# EAGLE board collatz_box (EAGLE 6.2)
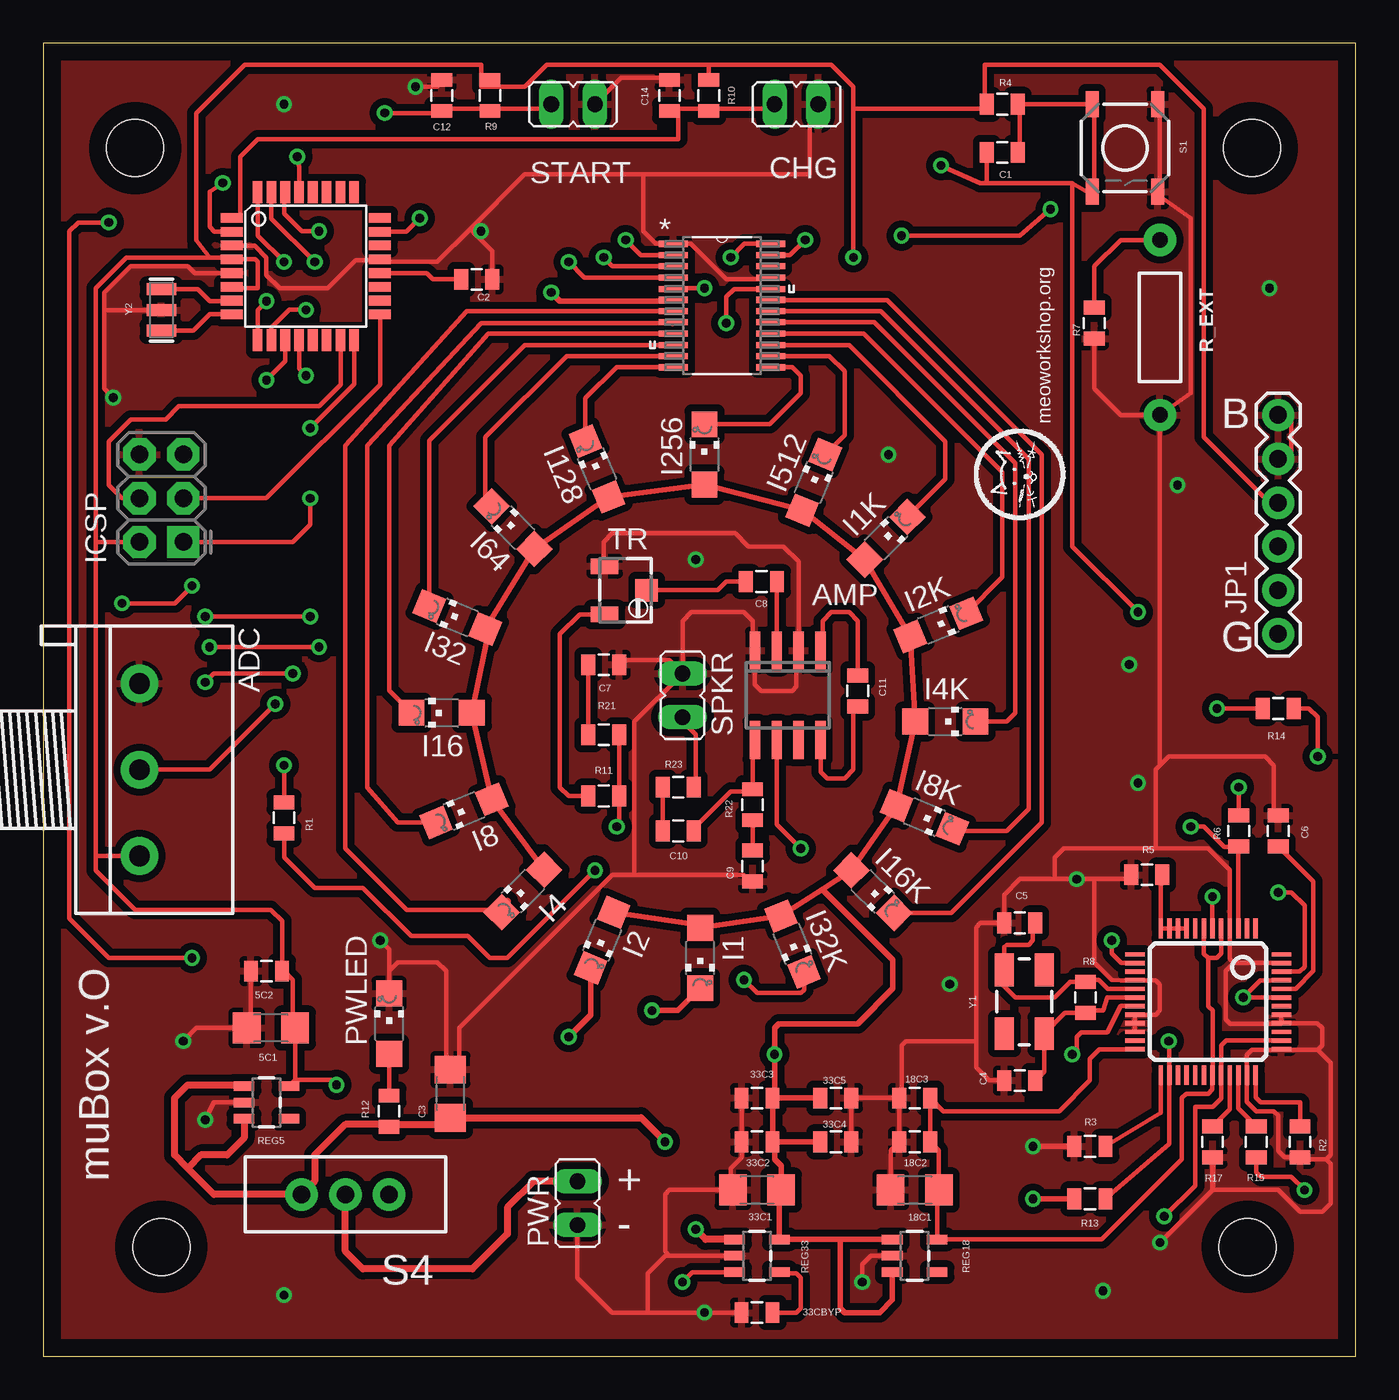
[diagram p0: board, top side]
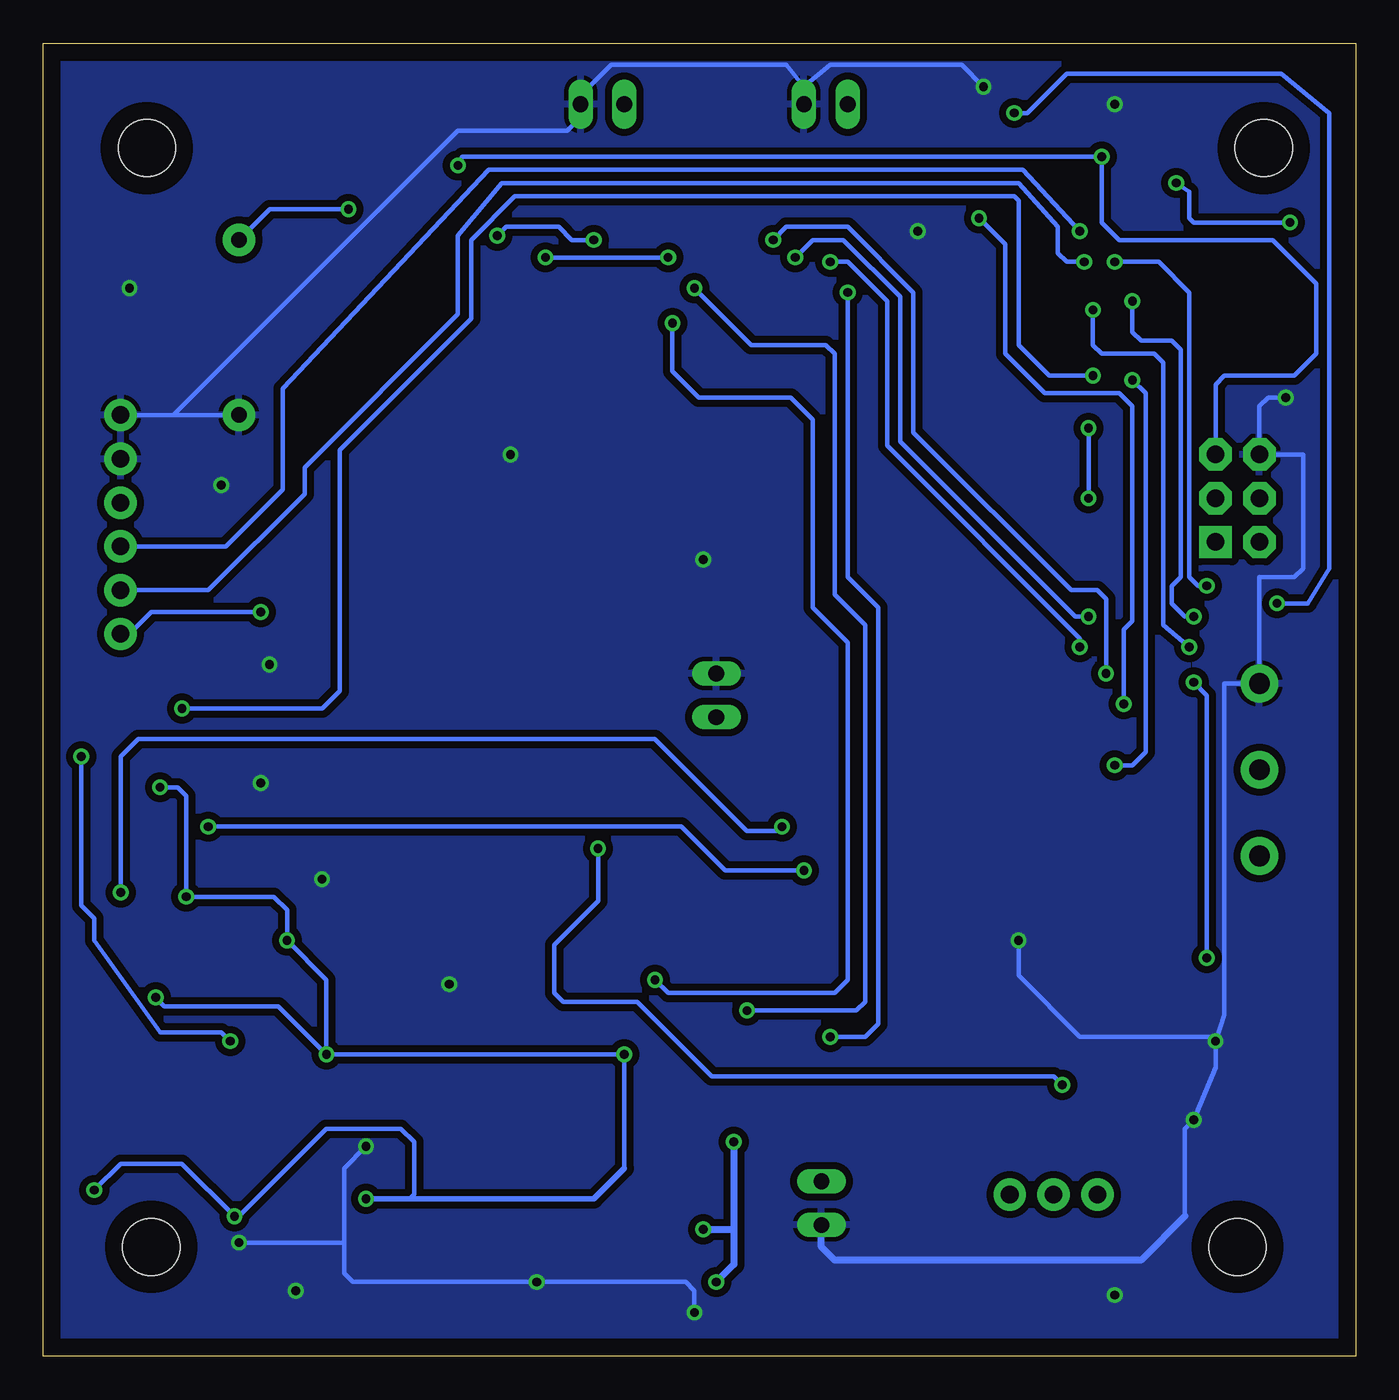
[diagram p1: board, bottom side, seen from below]

Size 76.12 x 76.19 mm. Coordinates in mm from the lower left corner, seen from the top.
Outline: 0,0 76.12,0 76.12,76.19 0,76.19 0,0
Copper layers (1*16): Top 0.035mm / dielectric 1.5mm / Bottom 0.035mm
Design rules: minimum track width 10mil, minimum drill 20mil, track to track 10mil, track to pad 10mil, pad to pad 10mil, via to via 10mil, smd to smd 8mil, copper to edge 40mil, drill to drill 8mil, minimum pad ring 10mil, minimum via ring 8mil, stop-mask expansion 4mil, vias tented up to drill 0mil, thermal gap 10mil

## Footprints (pad centres in the part's own frame; a part is rotated, then mirrored left to right if it is on the bottom)
1206 = smd 1.6 x 1.8: 1 -1.4,0; 2 1.4,0
0805 = smd 0.8 x 1.2: 1 -0.9,0; 2 0.9,0
3RP/1610N = drill 1.2 pad 2.184: 1 -5,0; 2 0,0; 3 5,0
SO08 = smd 0.6 x 2.2: 1 -1.905,-2.6; 2 -0.635,-2.6; 3 0.635,-2.6; 4 1.905,-2.6; 5 1.905,2.6; 6 0.635,2.6; 7 -0.635,2.6; 8 -1.905,2.6
JP1 = drill 0.914 long: 1 0,-1.27; 2 0,1.27
CHIPLED_1206 = smd 1.5 x 1.5: A 0,-1.75; C 0,1.75
2X3-NS = drill 1.016 pad 1.88 square: 1 -2.54,-1.27 | drill 1.016 pad 1.88 octagon: 2 -2.54,1.27; 3 0,-1.27; 4 0,1.27; 5 2.54,-1.27; 6 2.54,1.27
FTDI_BASIC = drill 1.016 pad 1.88: CTS 10.16,0; DTR 0,0; GND 12.7,0; RXI 2.54,0; TXO 5.08,0; VCC 7.62,0
STAND-OFF = hole 3.302: 0,0
AXIAL-0.4 = drill 0.9 pad 1.88: P$1 -5.08,0; P$2 5.08,0
SOT23-5 = smd 0.55 x 1.2: 1 -0.95,-1.3; 2 0,-1.3; 3 0.95,-1.3; 4 0.95,1.3; 5 -0.95,1.3
TACTILE_SWITCH_SMD = smd 1.524 x 0.762: 1 -2.54,1.905; 2 2.54,1.905; 3 -2.54,-1.905; 4 2.54,-1.905
SWITCH-SPDT = drill 1.016 pad 1.88: 1 0,2.54; 2 0,0; 3 0,-2.54
3223W = smd 0.9 x 1.6: 1 -1.4,-1.215; 3 1.4,-1.215 | smd 1.3 x 1.3: 2 0,1.215
TQFP32-08 = smd 1.27 x 0.559: 1 -4.293,2.8; 2 -4.293,2; 3 -4.293,1.2; 4 -4.293,0.4; 5 -4.293,-0.4; 6 -4.293,-1.2; 7 -4.293,-2; 8 -4.293,-2.8; 17 4.293,-2.8; 18 4.293,-2; 19 4.293,-1.2; 20 4.293,-0.4; 21 4.293,0.4; 22 4.293,1.2; 23 4.293,2; 24 4.293,2.8 | smd 0.559 x 1.27: 9 -2.8,-4.293; 10 -2,-4.293; 11 -1.2,-4.293; 12 -0.4,-4.293; 13 0.4,-4.293; 14 1.2,-4.293; 15 2,-4.293; 16 2.8,-4.293; 25 2.8,4.293; 26 2,4.293; 27 1.2,4.293; 28 0.4,4.293; 29 -0.4,4.293; 30 -1.2,4.293; 31 -2,4.293; 32 -2.8,4.293
LQFP-48 = smd 0.254 x 1.143: 1 -2.75,-4.25; 2 -2.25,-4.25; 3 -1.75,-4.25; 4 -1.25,-4.25; 5 -0.75,-4.25; 6 -0.25,-4.25; 7 0.25,-4.25; 8 0.75,-4.25; 9 1.25,-4.25; 10 1.75,-4.25; 11 2.25,-4.25; 12 2.75,-4.25; 25 2.75,4.25; 26 2.25,4.25; 27 1.75,4.25; 28 1.25,4.25; 29 0.75,4.25; 30 0.25,4.25; 31 -0.25,4.25; 32 -0.75,4.25; 33 -1.25,4.25; 34 -1.75,4.25; 35 -2.25,4.25; 36 -2.75,4.25 | smd 1.143 x 0.254: 13 4.25,-2.75; 14 4.25,-2.25; 15 4.25,-1.75; 16 4.25,-1.25; 17 4.25,-0.75; 18 4.25,-0.25; 19 4.25,0.25; 20 4.25,0.75; 21 4.25,1.25; 22 4.25,1.75; 23 4.25,2.25; 24 4.25,2.75; 37 -4.25,2.75; 38 -4.25,2.25; 39 -4.25,1.75; 40 -4.25,1.25; 41 -4.25,0.75; 42 -4.25,0.25; 43 -4.25,-0.25; 44 -4.25,-0.75; 45 -4.25,-1.25; 46 -4.25,-1.75; 47 -4.25,-2.25; 48 -4.25,-2.75
PW24 = smd 1.676 x 0.356: 1 -2.819,3.581; 2 -2.819,2.921; 3 -2.819,2.286; 4 -2.819,1.626; 5 -2.819,0.965; 6 -2.819,0.33; 7 -2.819,-0.33; 8 -2.819,-0.965; 9 -2.819,-1.626; 10 -2.819,-2.286; 11 -2.819,-2.921; 12 -2.819,-3.581; 13 2.819,-3.581; 14 2.819,-2.921; 15 2.819,-2.286; 16 2.819,-1.626; 17 2.819,-0.965; 18 2.819,-0.33; 19 2.819,0.33; 20 2.819,0.965; 21 2.819,1.626; 22 2.819,2.286; 23 2.819,2.921; 24 2.819,3.581
CRYSTAL-SMD-5X3 = smd 1.9 x 1.1: 1 -1.85,-1.15; 2 1.85,-1.15; 3 1.85,1.15; 4 -1.85,1.15
RESONATOR-SMD = smd 0.7 x 1.7: 1 -1.2,0; 2 0,0; 3 1.2,0

## Placement (x,y rotation side)
5C1  10u  [1206]  13.21,19.05 180 top
5C2  0.1u  [0805]  12.95,22.35 180 top
18C1  10u  [1206]  50.55,9.65 180 top
18C2  .1u  [0805]  50.55,12.45 180 top
18C3  0.1u  [0805]  50.55,14.99 180 top
33C1  10u  [1206]  41.4,9.65 180 top
33C2  0.1u  [0805]  41.4,12.45 180 top
33C3  0.1u  [0805]  41.4,14.99 180 top
33C4  0.1u  [0805]  45.97,12.45 0 top
33C5  0.1u  [0805]  45.97,14.99 0 top
33CBYP  470p  [0805]  41.4,2.54 180 top
ADC  [3RP/1610N]  5.59,34.04 270 top
AMP  LM386M-1  [SO08]  43.18,38.35 180 top
C1  0.1u  [0805]  55.63,69.85 0 top
C2  0.1u  [0805]  25.15,62.48 180 top
C3  10u  [1206]  23.62,15.24 90 top
C4  22p  [0805]  56.64,16 0 top
C5  22p  [0805]  56.64,25.15 0 top
C6  1u  [0805]  71.63,30.48 90 top
C7  10n  [0805]  32.51,40.13 180 top
C8  1u  [0805]  41.66,44.96 180 top
C9  0.047u  [0805]  41.15,28.45 90 top
C10  1u  [0805]  36.83,30.48 0 top
C11  10u  [0805]  47.24,38.61 270 top
C12  100n  [0805]  23.11,73.15 270 top
C14  100n  [0805]  36.32,73.15 270 top
CHG  [JP1]  43.69,72.64 270 top
I1  [CHIPLED_1206]  38.1,23.11 180 top
I1K  [CHIPLED_1206]  48.89,47.47 315 top
I2  [CHIPLED_1206]  32.41,24.15 157.5 top
I2K  [CHIPLED_1206]  51.91,42.44 292.5 top
I4  [CHIPLED_1206]  27.82,27 135 top
I4K  [CHIPLED_1206]  52.32,36.83 270 top
I8  [CHIPLED_1206]  24.4,31.65 112.5 top
I8K  [CHIPLED_1206]  51.11,31.28 247.5 top
I16  [CHIPLED_1206]  23.11,37.34 90 top
I16K  [CHIPLED_1206]  48.11,26.97 225 top
I32  [CHIPLED_1206]  24.02,42.87 67.5 top
I32K  [CHIPLED_1206]  43.46,23.93 202.5 top
I64  [CHIPLED_1206]  27.25,48.08 45 top
I128  [CHIPLED_1206]  32.12,51.48 22.5 top
I256  [CHIPLED_1206]  38.35,52.32 0 top
I512  [CHIPLED_1206]  44.68,50.7 337.5 top
ICSP  AVR_SPI_PRG_6NS  [2X3-NS]  6.86,49.78 90 top
JP1  FTDI_BASICPTH  [FTDI_BASIC]  71.63,41.91 90 top
JP2  STAND-OFF  [STAND-OFF]  69.85,6.35 0 top
JP3  STAND-OFF  [STAND-OFF]  6.86,6.35 0 top
JP4  STAND-OFF  [STAND-OFF]  5.33,70.1 0 top
JP5  STAND-OFF  [STAND-OFF]  70.1,70.1 0 top
PWLED  [CHIPLED_1206]  20.07,19.3 0 top
PWR  [JP1]  30.99,8.89 0 top
R1  1k  [0805]  13.97,31.24 90 top
R2  100k  [0805]  72.9,12.45 90 top
R3  100k  [0805]  60.71,12.19 0 top
R4  10k  [0805]  55.63,72.64 180 top
R5  100k  [0805]  64.01,27.94 0 top
R6  100k  [0805]  69.34,30.48 90 top
R7  22k  [0805]  60.96,59.94 90 top
R8  1M  [0805]  60.45,20.83 270 top
R9  100k  [0805]  25.91,73.15 90 top
R10  100k  [0805]  38.61,73.15 90 top
R11  100  [0805]  32.51,32.51 0 top
R12  10k  [0805]  20.07,14.22 270 top
R13  100k  [0805]  60.71,9.14 180 top
R14  1k  [0805]  71.63,37.59 180 top
R15  100k  [0805]  70.36,12.45 90 top
R17  100k  [0805]  67.82,12.45 90 top
R21  20  [0805]  32.51,36.07 0 top
R22  10  [0805]  41.15,32 90 top
R23  100  [0805]  36.83,33.02 180 top
R_EXT  [AXIAL-0.4]  64.77,59.69 90 top
REG5  V_REG_LDOSMD  [SOT23-5]  12.95,14.73 270 top
REG18  V_REG_LDOSMD  [SOT23-5]  50.55,5.84 270 top
REG33  V_REG_LDOSMD  [SOT23-5]  41.4,5.84 270 top
S1  [TACTILE_SWITCH_SMD]  62.74,70.1 270 top
S4  [SWITCH-SPDT]  17.53,9.4 270 top
SPKR  [JP1]  37.08,38.35 180 top
START  [JP1]  30.73,72.64 270 top
TR  [3223W]  33.78,44.45 270 top
U4  ATMEGA328  [TQFP32-08]  15.24,63.25 0 top
U5  VS1033  [LQFP-48]  67.56,20.57 180 top
U6  TLC5925_PW_24  [PW24]  39.37,60.96 0 top
Y1  12.288MHz  [CRYSTAL-SMD-5X3]  56.9,20.57 270 top
Y2  RESONATORSMD  [RESONATOR-SMD]  6.86,60.71 270 top

## Library data of the parts
5C1 18C1 33C1 C3 R1-R15 R17 R21-R23 = SparkFun-Passives
5C2 18C2 18C3 33C2-33C5 33CBYP C1 C2 C4-C12 C14 = SparkFun-Capacitors
ADC TR = pot
AMP = linear
CHG PWR SPKR START = jumper
I1 I1K I2 I2K I4 I4K I8 I8K I16 I16K I32 I32K I64 I128 I256 I512 PWLED = led
ICSP JP1 = SparkFun-Connectors
JP2-JP5 S1 S4 = SparkFun-Electromechanical
R_EXT = SparkFun-Resistors
REG5 REG18 REG33 = SparkFun-PowerIC
U4 U5 = SparkFun-DigitalIC
U6 = ti_tlc_5925; DATASHEETURL: http://www.ti.com/lit/gpn/TLC5925; DESCRIPTION: Low-Power 16-Channel Constant-Current LED Sink Driver; FAMILY_NAME: LED DRIVER; GENERIC_PART_NUMBER: TLC5925; INDUSTRY_STD_PKG_TYPE: TSSOP; MANUFACTURER: Texas Instruments; MANUFACTURER_PART_NUMBER: tlc5925_pw_24; PACKAGE_DESIGNATOR: PW; PIN_COUNT: 24; VENDOR: Texas Instruments
Y1 Y2 = SparkFun-FreqCtrl

## Nets
1.8V: 18C1.1 18C2.1 18C3.1 REG18.5 U5.5 U5.7 U5.24 U5.31
3.3V: 33C1.1 33C2.1 33C3.1 33C4.1 33C5.1 I1.A I1K.A I2.A I2K.A I4.A I4K.A I8.A I8K.A I16.A I16K.A I32.A I32K.A I64.A I128.A I256.A I512.A R6.2 R13.2 R15.1 REG18.1 REG18.3 REG33.5 U5.6 U5.14 U5.19 U5.32 U5.38 U5.43 U5.45
+5V: 5C1.1 5C2.1 ADC.3 AMP.6 ICSP.2 JP1.VCC R4.2 R9.2 R10.2 REG5.5 U4.4 U4.6 U6.24
CHG: C14.2 CHG.1 R10.1 U4.1
CLK: U4.9 U6.3
DNU: U4.13
DTR: C1.1 C1.2 ICSP.5 JP1.DTR R4.1 S1.3 S1.4 U4.29
GND: 5C1.2 5C2.2 18C1.2 18C2.2 18C3.2 33C1.2 33C2.2 33C3.2 33C4.2 33C5.2 33CBYP.2 ADC.1 AMP.2 AMP.4 C2.1 C3.2 C4.1 C5.1 C6.2 C7.1 C9.1 C12.1 C14.1 CHG.2 ICSP.6 JP1.CTS JP1.GND PWLED.C PWR.1 R2.1 R3.1 R5.1 R7.1 R17.1 R_EXT.P$1 REG5.2 REG18.2 REG33.2 S1.1 S1.2 SPKR.1 START.2 TR.1 U4.3 U4.5 U4.21 U5.4 U5.16 U5.20 U5.21 U5.22 U5.35 U5.37 U5.40 U5.41 U5.47 U6.1 U6.21 Y2.2
GPIO0: R17.2 U5.33
GPIO1: R15.2 U5.34
IO1: U4.14
IO2: ICSP.4 U4.15
IO3: ICSP.1 U4.16
IO4: ICSP.3 U4.17
LE: U4.10 U6.4
MIDI: R13.1 R14.1 U5.26
N$1: PWLED.A R12.1
N$2: 33CBYP.1 REG33.4
N$4: C4.2 R8.2 U5.18 Y1.3
N$5: C5.2 R8.1 U5.17 Y1.1
N$6: U4.7 Y2.1
N$7: R3.2 U5.25
N$8: R2.2 U5.36
N$9: U4.8 Y2.3
N$10: C6.1 U5.44
N$11: C2.2 U4.20
N$12: C10.1 R23.2
N$13: C7.2 R21.1
N$15: R11.1 TR.3
N$17: C8.2 TR.2
N$18: AMP.3 C8.1
N$19: R23.1 SPKR.2
N$25: AMP.1 C11.1
N$26: AMP.8 C11.2
N$27: R5.2 U5.9 U5.10 U5.11 U5.12
N$29: AMP.5 C10.2 R22.2
N$30: C9.2 R22.1
N$42: PWR.2 S4.2
N$51: R1.2 U4.11
N$52: R14.2 U4.12
OUT: R11.2 R21.2 U5.46
OUT0: I1.C U6.5
OUT1: I2.C U6.6
OUT2: I4.C U6.7
OUT3: I8.C U6.8
OUT4: I16.C U6.9
OUT5: I32.C U6.10
OUT6: I64.C U6.11
OUT7: I128.C U6.12
OUT8: I256.C U6.13
OUT9: I512.C U6.14
OUT10: I1K.C U6.15
OUT11: I2K.C U6.16
OUT12: I4K.C U6.17
OUT13: I8K.C U6.18
OUT14: I16K.C U6.19
OUT15: I32K.C U6.20
POT: ADC.2 U4.23
PWIN: C3.1 R12.2 REG5.1 REG5.3 REG33.1 REG33.3 S4.3
RESET: R1.1 R6.1 U5.3
REXT: R7.2 R_EXT.P$2 U6.23
RXI: JP1.TXO U4.30
SDI: U4.2 U6.2
START: C12.2 R9.1 START.1 U4.32
TXO: JP1.RXI U4.31

## Tracks (layer width: path | path; a pad name or v marks a point on that pad's centre or on a via)
1.8V
  Top 0.254: 18C1.1 51.95,11.95 18C2.1 18C3.1 52.21,14.22 58.93,14.22 60.71,16 60.71,17.27 61.26,17.82 U5.24 | 51.85,9.55 REG18.5 61.4,6.79 66.04,11.43 66.04,14.99 66.29,15.24 67.56,15.24 67.81,15.49 U5.31 67.82,20.07 67.56,20.32 67.56,23.11 | U5.7 67.31,23.36 67.56,23.11 | 67.56,23.11 68.07,23.11 68.33,23.37 68.33,24.81 U5.5
  Top 0.305: 18C1.1 51.85,9.55
3.3V  (via drill 0.51)
  Top 0.254: R6.2 v69.34,33.02 | v65.02,8.13 66.8,9.91 66.8,14.48 67.82,14.48 68.31,14.97 U5.32 68.33,16.34 68.33,18.03 68.62,18.32 U5.38 | R15.1 70.36,10.67 70.61,10.41 72.39,10.41 v73.15,9.65 | U5.19 62.49,20.32 61.72,18.8 60.2,18.8 59.94,18.54 59.94,17.78 | U5.43 v69.6,20.83 70.59,21.82 U5.45 | U5.6 v67.81,26.67 v67.82,26.67 | v61.98,24.13 61.98,23.37 62.52,22.82 U5.14
  Top 0.305: 33C3.1 33C5.1 | 33C4.1 33C2.1 | R13.2 v57.4,9.14 | 59.94,17.78 v59.69,17.53 | 45.18,27.1 I32K.A 38.64,24.94 I2.A | 45.18,27.1 I16K.A I8K.A I4K.A I2K.A I1K.A I512.A I256.A I128.A I64.A 25.99,42.78 I16.A I8.A I4.A | 45.18,27.1 49.28,23.01 49.28,21.34 47.24,19.3 42.67,19.3 42.42,19.05 v42.42,17.53 42.42,15.1 33C3.1 | 33C2.1 33C3.1 | 33C2.1 42.42,12.33 42.42,11.43 42.8,11.05 33C1.1 42.7,9.55 REG33.5 46.23,6.79 | REG18.1 46.23,6.79 | REG18.3 49.25,3.27 48.51,2.54 46.48,2.54 46.23,2.79 46.23,6.79
  Top 0.406: 46.4,27.92 I16K.A | I32.A 25.99,42.78 | 38.64,24.94 I1.A
  Bottom 0.254: v59.69,17.53 v42.42,17.53 42.42,10.92 | v69.34,33.02 68.33,33.02 67.82,32.51 v67.82,26.67 62.74,26.67 61.98,25.91 v61.98,24.13 59.69,21.84 v59.69,17.53 | 54.86,9.14 54.61,9.4 54.61,12.45 55.37,13.21 59.69,13.21 64.77,8.13 v65.02,8.13 68.07,11.18 71.63,11.18 v73.15,9.65 | v69.6,20.83 69.09,20.32 62.48,20.32 v59.69,17.53
  Bottom 0.305: 42.42,10.92 44.2,9.14 54.86,9.14 v57.4,9.14
+5V  (via drill 0.51)
  Top 0.254: 14.61,16.04 5C1.1 14.48,19.18 14.48,21.84 13.97,22.35 5C2.1 13.85,25.26 13.21,25.91 5.33,25.91 3.05,28.19 3.05,28.96 | 14.61,16.04 REG5.5 | 3.05,28.96 3.05,47.24 | 3.05,47.24 3.05,61.98 4.83,63.75 9.65,63.75 | 9.65,63.75 10.84,63.75 | 10.84,63.75 U4.4 | U4.4 12.3,63.65 12.45,63.5 12.45,61.98 11.13,61.98 U4.6 | ADC.3 3.13,29.04 3.05,28.96 | ICSP.2 3.05,47.24 | 25.4,73.66 27.94,73.66 29.21,74.93 38.61,74.93 | R10.2 38.61,74.93 | 46.99,72.39 54.61,72.39 | 46.99,72.39 46.99,73.66 45.72,74.93 38.61,74.93 | 54.61,72.39 54.61,74.93 64.77,74.93 67.31,72.39 67.31,53.34 71.12,49.53 JP1.VCC | 54.61,72.39 R4.2 | 10.84,63.75 10.92,63.75 U4.4 | 9.65,63.75 8.89,64.77 8.89,72.14 11.68,74.93 25.4,74.93 25.4,73.66 | 25.4,73.66 R9.2 | 46.99,72.39 v46.99,63.75 | U6.24 40.66,64.54 v39.88,63.75 | AMP.6 42.55,30.86 v43.94,29.46 | 14.61,16.04 16.73,16.04 v17.02,15.75
  Bottom 0.254: v39.88,63.75 v46.99,63.75 | v43.94,29.46 43.94,26.42 46.48,23.88 46.48,21.08 45.97,20.57 41.66,20.57 37.34,16.26 17.53,16.26 v17.02,15.75
CHG
  Top 0.254: 38.1,72.39 36.83,72.39 | 36.83,72.39 36.83,70.61 12.45,70.61 11.43,69.6 11.43,66.04 U4.1 | 36.83,72.39 C14.2 | 38.1,72.39 41.91,72.39 CHG.1 | 38.1,72.39 R10.1
CLK  (via drill 0.51)
  Top 0.254: U4.9 12.44,60.7 v12.95,61.21 | v9.4,42.93 v15.49,42.93 | U6.3 33.02,63.25 v32.51,63.75
  Bottom 0.254: v12.95,61.21 12.95,59.44 12.45,58.93 10.67,58.93 10.16,58.42 10.16,45.21 10.67,44.7 10.67,43.69 9.91,42.93 v9.4,42.93 | v15.49,42.93 16.26,42.93 26.42,53.09 26.42,61.47 29.72,64.77 31.5,64.77 v32.51,63.75
DTR  (via drill 0.51)
  Top 0.254: 60.96,67.31 59.69,68.07 | 59.69,68.07 54.61,68.07 | 54.61,68.07 54.36,68.07 v52.07,69.09 | 60.96,67.31 60.96,72.39 S1.3 R4.1 56.64,72.53 56.64,69.85 C1.2 | 60.96,67.31 S1.4 | v63.5,43.18 59.69,46.99 59.69,68.07 | U4.29 14.84,68.98 v14.73,69.6 | C1.1 54.73,68.19 54.61,68.07
  Bottom 0.254: v63.5,43.18 69.85,43.18 71.12,41.91 JP1.DTR | ICSP.5 8.13,56.39 7.62,56.9 3.56,56.9 2.29,58.17 2.29,62.23 4.83,64.77 13.72,64.77 14.73,65.79 v14.73,69.6 51.82,69.6 v52.07,69.09
GND  (via drill 0.51)
  Top 0.254: 43.69,40.83 43.69,38.86 43.43,38.61 41.66,38.61 41.27,38.99 AMP.4 | 41.15,41.08 41.15,42.67 40.64,43.18 37.59,43.18 37.08,42.67 SPKR.1 | 33.67,40.39 36.32,40.39 SPKR.1 | 32.51,45.91 32.51,47.24 33.02,47.75 40.13,47.75 40.89,46.99 42.93,46.99 43.81,46.1 AMP.2 | 54.1,18.29 54.1,24.89 54.36,25.15 C5.1 55.74,26.79 56.64,27.69 58.67,27.69 | 54.1,18.29 54.1,16.76 54.86,16 C4.1 | 62.85,27.69 60.96,27.69 | 60.96,27.69 v59.94,27.69 58.67,27.69 | 71.86,17.78 73.91,17.78 | 73.91,17.78 74.17,18.03 74.17,19.05 73.89,19.32 U5.40 | 73.01,11.43 74.42,11.43 | 74.42,11.43 74.68,11.68 74.68,17.02 73.91,17.78 | R2.1 72.02,11.55 71.63,11.94 71.63,13.97 71.37,14.22 70.36,14.22 69.81,14.77 U5.35 69.81,17.49 70.1,17.78 71.77,17.78 U5.37 | 33C4.2 33C5.2 18C3.2 18C2.2 49.15,11.95 18C1.2 | 49.78,15.12 49.78,18.03 50.04,18.29 54.1,18.29 | 64.52,29.46 67.56,29.46 68.81,28.21 U5.4 68.81,23.06 69.05,22.82 | 64.52,29.46 59.18,29.46 58.67,28.96 58.67,27.69 | 71.37,31.63 71.37,34.29 70.87,34.8 65.28,34.8 64.77,34.29 | 64.77,34.29 64.52,34.04 64.52,29.46 | 60.96,27.69 60.96,22.86 61.98,21.84 62.5,21.82 U5.16 64.54,21.82 64.77,21.59 64.77,20.07 64.52,19.81 63.33,19.81 U5.20 U5.21 U5.22 | 33CBYP.2 v38.35,2.54 35.05,2.54 | v64.77,6.6 67.82,9.65 71.63,9.65 72.9,8.38 74.17,8.38 74.68,8.89 74.68,11.18 74.42,11.43 | U5.41 U5.40 | U5.47 69.05,22.82 | 69.05,22.82 68.58,22.35 68.58,19.56 68.83,19.3 71.79,19.3 U5.40 | PWR.1 30.99,4.57 33.02,2.54 35.05,2.54 | REG33.2 36.32,5.84 | 36.32,5.84 36.07,5.84 35.05,4.83 35.05,2.54 | 36.32,5.84 36.07,6.1 36.07,9.4 36.32,9.65 33C1.2 39.88,9.78 39.88,10.92 40.5,11.55 33C2.2 33C3.2
  Top 0.254: v8.13,18.29 8.89,19.05 5C1.2 12.05,19.3 5C2.2 | PWLED.C 20.07,22.35 | 20.07,22.35 20.57,22.86 22.86,22.86 23.37,22.35 23.37,16.89 C3.2 24.13,16.51 24.13,19.05 33.02,27.94 34.29,27.94 | 20.07,22.35 20.07,23.62 v19.56,24.13 | U4.5 8.78,62.85 8.38,63.25 5.08,63.25 3.56,61.72 3.56,60.71 | v21.59,73.66 22.86,73.66 C12.1 | C14.1 35.81,74.17 33.53,74.17 START.2 | 24.77,65.41 27.94,68.58 34.8,68.58 | 24.77,65.41 22.86,63.5 19.05,63.5 U4.21 19.49,63.6 18.14,63.6 16.51,61.98 13.72,61.98 12.95,62.74 12.95,63.75 12.26,64.45 U4.3 | 34.8,68.58 44.45,68.58 44.45,72.39 CHG.2 | JP1.CTS 72.39,52.07 72.39,54.61 JP1.GND | 64.77,67.31 64.77,72.39 S1.1 | 64.77,67.31 66.55,66.04 66.55,55.88 R_EXT.P$1 | 64.77,67.31 S1.2 | 34.29,27.94 40.64,27.94 C9.1 | 34.29,27.94 34.29,36.83 SPKR.1 | 64.77,34.29 R_EXT.P$1 | 34.8,68.58 34.8,65.28 35.53,64.54 U6.1 37.57,64.54 39.62,62.48 42.09,62.48 U6.21 | R7.1 60.96,56.13 62.48,54.61 R_EXT.P$1 | C2.1 26.05,64.12 24.77,65.41 | Y2.2 3.56,60.71 | v4.06,55.63 3.56,56.13 3.56,60.71 | REG5.2 9.91,14.73 v9.4,13.72 | REG18.2 48.01,5.84 47.5,5.33 v47.5,4.32
  Top 0.305: AMP.2 43.69,40.83 | AMP.4 41.15,41.08 | C7.1 33.67,40.39 | TR.1 32.51,45.91 | R5.1 62.85,27.69 | R2.1 73.01,11.43 | 33C1.2 40.5,10.15 | 18C3.2 49.78,15.12 | C6.2 71.37,31.63 | R3.1 v57.4,12.19 | R17.1 67.82,9.65
  Bottom 0.254: v38.35,2.54 38.35,3.81 38.86,4.32 v47.5,4.32 58.17,4.32 58.67,4.83 58.67,6.6 | 58.67,6.6 58.67,10.92 v57.4,12.19 | v64.77,6.6 58.67,6.6 | v8.13,18.29 8.13,16.76 v9.4,13.72 9.91,13.21 9.91,8.13 | v19.56,24.13 19.56,22.1 16,18.54 8.38,18.54 v8.13,18.29 | v8.13,18.29 7.62,19.81 7.62,39.04 ADC.1 5.59,45.21 3.56,45.21 3.05,45.72 3.05,52.32 ICSP.6 5.59,55.12 5.08,55.63 v4.06,55.63 | v21.59,73.66 22.86,74.93 30.48,74.93 32,73.66 | 32,73.66 33.02,74.93 43.18,74.93 44.45,73.66 CHG.2 44.45,72.39 45.72,71.12 52.07,71.12 68.58,54.61 | 32,73.66 START.2 | R_EXT.P$1 68.58,54.61 | 68.58,54.61 JP1.GND
  Bottom 0.406: 9.91,8.13 12.45,5.59 30.23,5.59 30.99,6.35 PWR.1
  other vias: 52.58,21.59 61.47,3.81 13.97,3.56 13.97,72.64 71.12,61.98 49.02,52.32 63.5,33.27 62.99,40.13 65.79,50.55 37.85,46.23 25.4,65.28
  pour Top (isolate 0.406): 0,0 76.2,0 76.2,76.2 0,76.2
  pour Bottom (isolate 0.406): 0,0 76.2,0 76.2,76.2 0,76.2
GPIO0
  Top 0.254: R17.2 68.81,14.34 U5.33
GPIO1
  Top 0.254: R15.2 69.31,14.39 U5.34
IO2
  Top 0.254: ICSP.4 4.57,49.78 3.81,50.55 3.81,53.09 5.08,54.36 7.11,54.36 7.87,55.12 16,55.12 17.27,56.39 17.27,58.92 U4.15
IO3  (via drill 0.51)
  Top 0.254: ICSP.1 14.48,47.24 15.49,48.26 v15.49,49.78 | v15.49,53.85 18.04,56.39 U4.16
  Bottom 0.254: v15.49,49.78 v15.49,53.85
IO4
  Top 0.254: ICSP.3 12.95,49.78 19.56,56.39 19.56,60.42 U4.17
LE  (via drill 0.51)
  Top 0.254: U6.4 31.39,62.59 v30.48,63.5 | U4.10 13.24,59.7 14.28,60.73 15.21,60.73 v15.24,60.71 | v9.65,41.15 v16,41.15
  Bottom 0.254: v9.65,41.15 11.18,42.42 11.18,57.66 11.68,58.17 14.73,58.17 15.24,58.67 v15.24,60.71 | v16,41.15 16,41.66 27.18,52.83 27.18,61.21 29.46,63.5 v30.48,63.5
MIDI  (via drill 0.51)
  Top 0.254: R13.1 65.31,12.34 U5.26 65.31,18.25 v65.28,18.29 | R14.1 73.41,37.59 73.91,37.08 v73.91,34.8
  Bottom 0.254: v65.28,18.29 65.79,18.8 69.34,18.8 73.15,24.13 73.15,25.4 73.91,26.16 v73.91,34.8
N$1
  Top 0.254: R12.1 PWLED.A
N$2
  Top 0.254: 33CBYP.1 43.69,2.54 43.94,2.79 43.94,4.57 43.69,4.83 42.77,4.83
  Top 0.305: 42.77,4.83 REG33.4
N$4
  Top 0.254: U5.18 61.72,20.82 61.47,20.07 60.59,20.07 | R8.2 59.25,19.93 Y1.3 58.05,16.51 C4.2
  Top 0.305: 60.59,20.07 R8.2
N$5
  Top 0.254: U5.17 61.73,21.32 61.21,21.84 60.57,21.84 | R8.1 59.55,21.73 59.55,21.71 58.67,20.83 56.39,20.83 55.63,21.59 55.63,22.3 Y1.1 55.75,23.74 55.88,23.88 57.15,23.88 57.4,24.13 57.4,25.01 C5.2
  Top 0.305: 60.57,21.84 R8.1
N$6
  Top 0.254: U4.7 10.91,61.21 9.65,61.21 8.96,61.91 Y2.1
N$7
  Top 0.254: R3.2 64.81,14.13 U5.25
N$8
  Top 0.254: R2.2 72.9,14.73 70.61,14.73 70.31,15.03 U5.36
N$9
  Top 0.254: U4.8 9.65,60.45 8.71,59.51 Y2.3
N$10
  Top 0.254: C6.1 73.66,27.55 73.66,22.35 72.63,21.32 U5.44
N$11
  Top 0.254: U4.20 22.24,62.85 22.61,62.48 C2.2
N$12
  Top 0.254: C10.1 R23.2
N$13
  Top 0.254: C7.2 R21.1
N$15
  Top 0.254: R11.1 30.48,32.51 29.97,33.02 29.97,41.91 31.11,43.05 TR.3
N$17
  Top 0.254: TR.2 39.12,44.45 39.62,44.96 C8.2
N$18
  Top 0.254: 42.55,44.95 AMP.3
  Top 0.305: C8.1 42.55,44.95
N$19
  Top 0.254: 37.85,33.14 37.85,36.07 37.08,36.83
  Top 0.305: R23.1 37.85,33.14 | 37.08,36.83 SPKR.2
N$25
  Top 0.254: 45.21,41.08 45.21,42.67 45.72,43.18 46.74,43.18 47.24,42.67 C11.1
  Top 0.305: AMP.1 45.21,41.08
N$26
  Top 0.254: 46.99,37.45 46.99,34.04 46.48,33.53 45.47,33.53 45.09,33.91 AMP.8
  Top 0.305: C11.2 46.99,37.45
N$27
  Top 0.254: 64.81,27.85 U5.12 U5.11 U5.10 U5.9
  Top 0.305: 64.81,27.85 R5.2
N$29
  Top 0.254: 41.15,35.63 R22.2 | 40.78,32.77 39.88,32.77 37.73,30.62
  Top 0.305: AMP.5 41.15,35.63 | R22.2 41.03,33.02 40.78,32.77 | 37.73,30.62 C10.2
N$30
  Top 0.254: R22.1 C9.2
N$42
  Top 0.406: PWR.2 28.45,10.16 26.92,8.64 26.92,7.11 24.89,5.08 18.54,5.08 17.53,6.1 S4.2
N$51  (via drill 0.51)
  Top 0.254: U4.11 14.04,57.73 v12.95,56.64 | v13.97,34.29 R1.2
  Bottom 0.254: v12.95,56.64 12.19,55.88 12.19,35.05 12.95,34.29 v13.97,34.29
N$52  (via drill 0.51)
  Top 0.254: U4.12 14.84,57.3 v15.24,56.9 | v68.07,37.59 R14.2
  Bottom 0.254: v15.24,56.9 17.78,56.9 19.56,58.67 19.56,67.06 19.81,67.31 48.77,67.31 51.31,64.77 51.31,60.2 58.93,52.58 58.93,38.61 59.94,37.59 v68.07,37.59
OUT  (via drill 0.51)
  Top 0.254: R21.2 R11.2 33.41,30.87 v33.27,30.73 | U5.46 72.87,22.32 73.15,22.61 73.15,26.16 72.39,26.92 v71.63,26.92
  Bottom 0.254: v71.63,26.92 71.63,34.8 70.61,35.81 40.64,35.81 35.31,30.48 33.53,30.48 v33.27,30.73
OUT0  (via drill 0.51)
  Top 0.254: 36.6,61.98 v38.35,61.98
  Top 0.305: U6.5 36.6,61.98 | I1.C 36.8,20.07 v35.31,20.07
  Bottom 0.254: v38.35,61.98 35.05,58.67 30.73,58.67 30.23,58.17 30.23,44.2 28.45,42.42 28.45,20.57 28.96,20.07 v35.31,20.07
OUT1  (via drill 0.51)
  Top 0.305: U6.6 36.47,61.21 29.97,61.21 v29.46,61.72 | v30.48,18.54 31.75,19.81 I2.C
  Bottom 0.254: v29.46,61.72 29.46,45.21 27.69,43.43 27.69,19.3 28.45,18.54 v30.48,18.54
OUT2
  Top 0.254: U6.7 24.56,60.63 17.53,52.83 17.53,29.46 21.08,25.91 26.44,25.91
  Top 0.406: 26.92,26.42 26.59,26.08 I4.C 26.44,25.91
OUT3
  Top 0.254: I8.C 20.58,30.98 18.8,33.02 18.8,52.83 25.4,59.94 36.5,59.94
  Top 0.406: 36.5,59.94 U6.8
OUT4
  Top 0.254: U6.9 25.81,59.33 20.07,52.83 20.07,38.64 I16.C
OUT5
  Top 0.254: I32.C 22.4,53.13 27.94,58.67 U6.10
OUT6
  Top 0.254: U6.11 30.35,58.04 25.65,53.34 25.65,49.68
  Top 0.406: 25.65,49.68 I64.C
OUT7
  Top 0.254: I128.C 31.45,55.58 33.27,57.4 36.52,57.4
  Top 0.406: 36.52,57.4 U6.12
OUT8
  Top 0.254: U6.13 42.22,57.4 43.43,57.4 43.94,56.9 43.94,55.88 42.14,54.07 I256.C
OUT9
  Top 0.254: U6.14 45.59,58.04 46.48,57.15 46.48,53.45 I512.C
OUT10
  Top 0.254: U6.15 46.74,58.67 52.32,53.09 52.32,50.91 I1K.C
OUT11
  Top 0.254: U6.16 47.6,59.33 55.63,51.31 55.63,45.2 I2K.C
OUT12
  Top 0.254: U6.17 48.21,59.99 56.39,51.82 56.39,37.34 55.88,36.83 I4K.C
OUT13
  Top 0.254: U6.18 48.59,60.63 57.15,52.07 57.15,31.75 55.88,30.48 52.86,30.48
  Top 0.406: 52.86,30.48 I8K.C
OUT14
  Top 0.254: U6.19 48.95,61.29 57.91,52.32 57.91,30.99 52.65,25.73 I16K.C
OUT15  (via drill 0.51)
  Top 0.254: U6.20 40.08,61.92 39.62,61.47 v39.62,59.94 | I32K.C 44.13,21.27 43.94,21.08 41.4,21.08 v40.64,21.84
  Bottom 0.254: v39.62,59.94 39.62,57.15 38.1,55.63 32.77,55.63 31.5,54.36 31.5,43.43 29.46,41.4 29.46,21.84 30.23,21.08 39.88,21.08 v40.64,21.84
POT  (via drill 0.51)
  Top 0.254: ADC.2 9.65,34.04 v13.46,37.85 | U4.23 21.05,65.25 v21.84,66.04
  Bottom 0.254: v13.46,37.85 13.46,42.16 12.95,42.67 12.95,55.12 13.72,55.88 18.03,55.88 20.32,58.17 20.32,64.52 v21.84,66.04
PWIN  (via drill 0.51)
  Top 0.254: REG33.3 37.66,4.89 v37.08,4.32
  Top 0.406: 8.38,10.92 9.91,9.4 S4.3 15.75,10.16 15.75,11.68 17.53,13.46 20.07,13.46 | 8.38,10.92 7.62,11.68 7.62,14.99 8.38,15.75 11.59,15.75 REG5.1 | R12.2 20.07,13.46 | 20.07,13.46 23.24,13.46 C3.1 34.67,13.84 v36.07,12.45 | REG33.1 38.42,6.79 v37.85,7.37 | REG5.3 11.65,12.67 10.67,11.68 9.14,11.68 8.38,10.92
  Bottom 0.406: v36.07,12.45 36.07,7.37 | 36.07,7.37 36.07,5.33 v37.08,4.32 | v37.85,7.37 36.07,7.37
RESET  (via drill 0.51)
  Top 0.254: U5.3 69.31,29.55 68.49,29.55 67.31,30.73 v66.55,30.73 | v32,28.19 26.92,23.11 25.91,23.11 24.64,24.38 21.34,24.38 18.54,27.18 15.75,27.18 13.97,28.96 R1.1
  Top 0.305: R6.1 69.31,29.55
  Bottom 0.254: v66.55,30.73 39.12,30.73 36.58,28.19 v32,28.19
REXT  (via drill 0.51)
  Top 0.254: R_EXT.P$2 62.48,64.77 60.96,63.25 R7.2 | U6.23 43.31,63.88 v44.2,64.77 | v49.78,65.02 56.64,65.02 v58.42,66.55
  Bottom 0.254: v44.2,64.77 45.47,64.77 46.23,65.53 49.28,65.53 v49.78,65.02 | v58.42,66.55 62.99,66.55 R_EXT.P$2
RXI  (via drill 0.51)
  Top 0.254: U4.30 13.97,67.31 13.97,66.29 14.99,65.28 v16,65.28
  Bottom 0.254: v16,65.28 19.3,68.83 50.29,68.83 62.23,56.13 62.23,50.29 65.53,46.99 JP1.TXO
SDI  (via drill 0.51)
  Top 0.254: U6.2 34.67,63.88 v33.78,64.77 | U4.2 9.94,65.25 9.65,65.53 9.65,67.56 v10.41,68.07 | v3.81,65.79 2.03,65.79 1.52,65.28 1.52,25.4 3.81,23.11 v8.64,23.11 | v9.4,39.12 9.91,39.62 v14.48,39.62
  Bottom 0.254: v10.41,68.07 9.65,67.56 9.65,66.04 9.4,65.79 v3.81,65.79 | v8.64,23.11 8.64,38.35 v9.4,39.12 | v14.48,39.62 14.48,43.94 14.99,44.45 16.51,44.45 25.65,53.59 25.65,61.72 29.46,65.53 33.02,65.53 v33.78,64.77
START  (via drill 0.51)
  Top 0.254: 25.4,72.39 22.86,72.39 C12.2 23,72.14 v19.81,72.14 | 25.4,72.39 29.21,72.39 START.1 | 25.4,72.39 R9.1 | U4.32 12.44,65.03 v13.97,63.5 | v8.64,44.7 7.62,43.69 v4.57,43.69
  Bottom 0.254: v13.97,63.5 11.43,63.5 9.65,61.72 9.65,45.21 9.14,44.7 v8.64,44.7 | v4.57,43.69 2.79,43.69 1.52,45.72 1.52,72.14 4.32,74.42 16.76,74.42 19.05,72.14 v19.81,72.14
TXO  (via drill 0.51)
  Top 0.254: U4.31 13.24,66.01 v15.75,63.5
  Bottom 0.254: v15.75,63.5 16.76,63.5 17.27,64.01 17.27,65.53 19.56,68.07 49.53,68.07 52.07,65.02 52.07,60.45 60.96,51.56 60.96,50.04 66.55,44.45 JP1.RXI

## Text on the board
tPlace: meoworkshop.org | B | G | muBox v.O | + | - | /Volumes/FDR0/mlogo.bmp